# Altium PCB AVR_MAIN.PcbDoc
Units mil, origin at the board's own origin, x right, y up, seen from the top; angles counter-clockwise.
Board outline 1500 x 2200 mil, 2 copper layers (Top Layer, Bottom Layer); 21 components, 23 nets, 91 pads, 1 vias.
Unrouted connection lines stored in the file: 2.
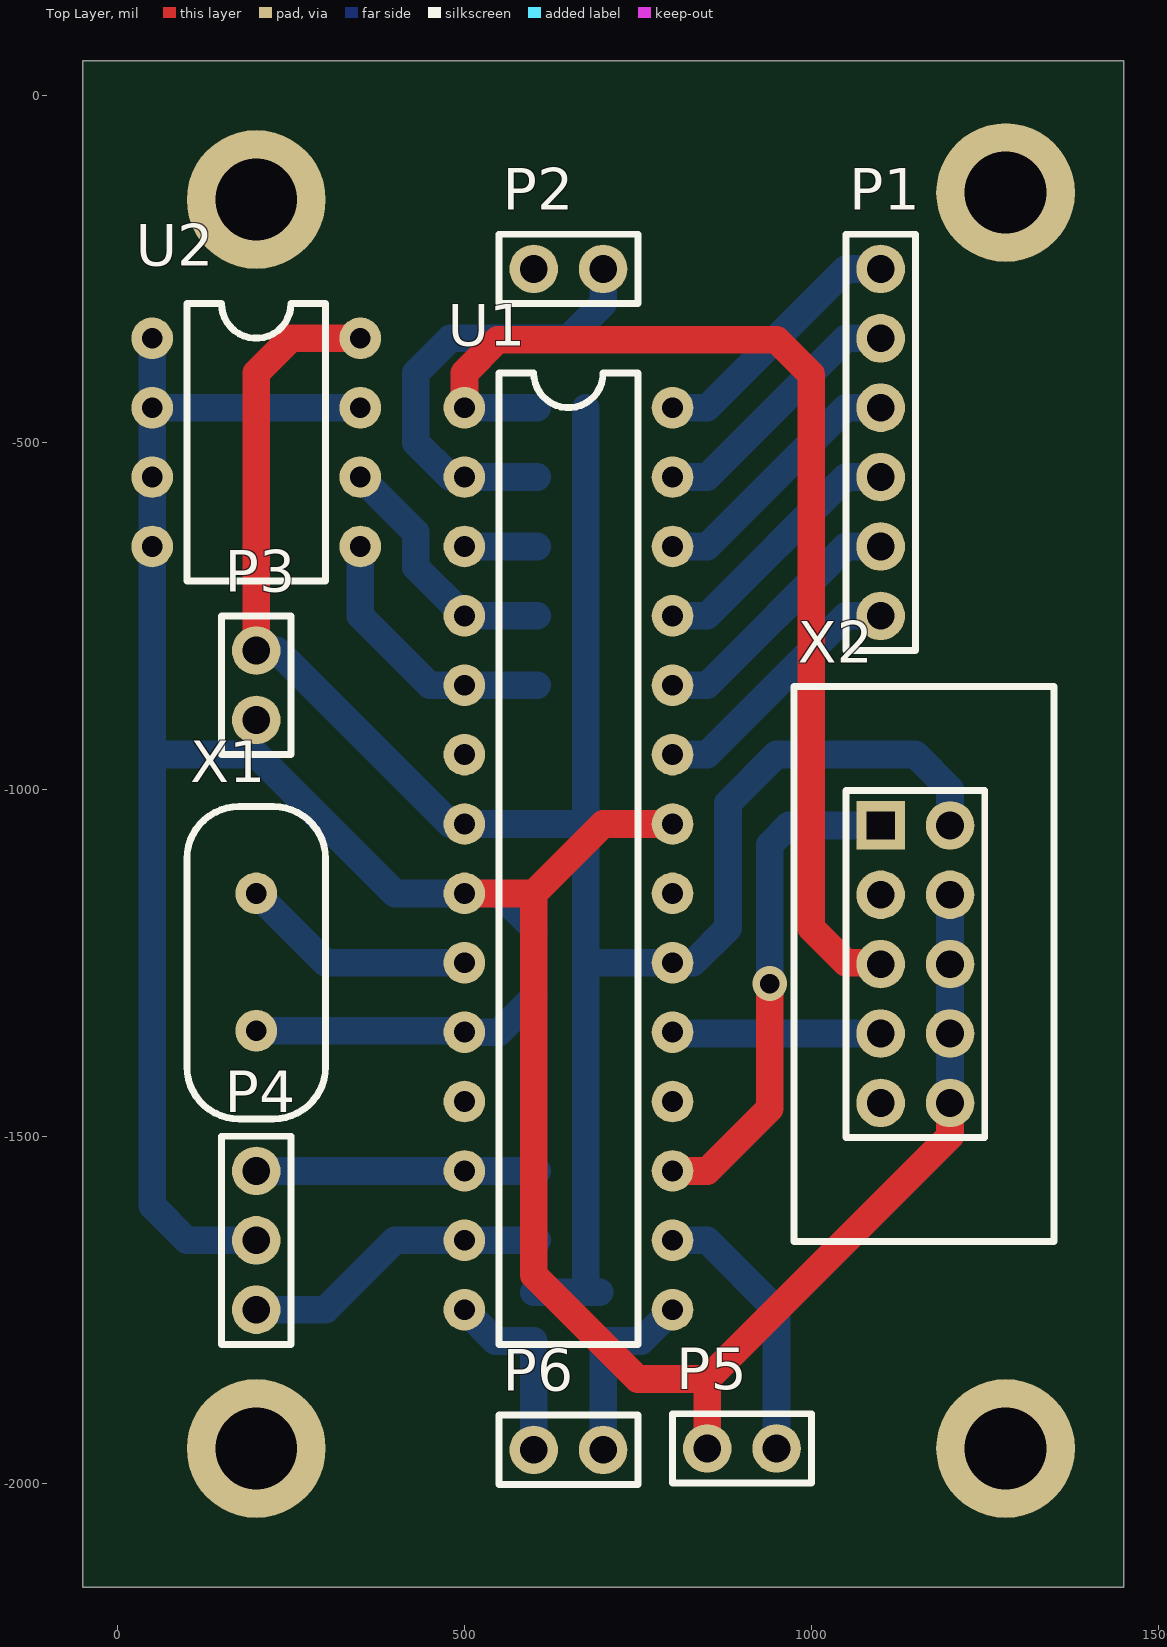
[diagram p0: Top Layer view]
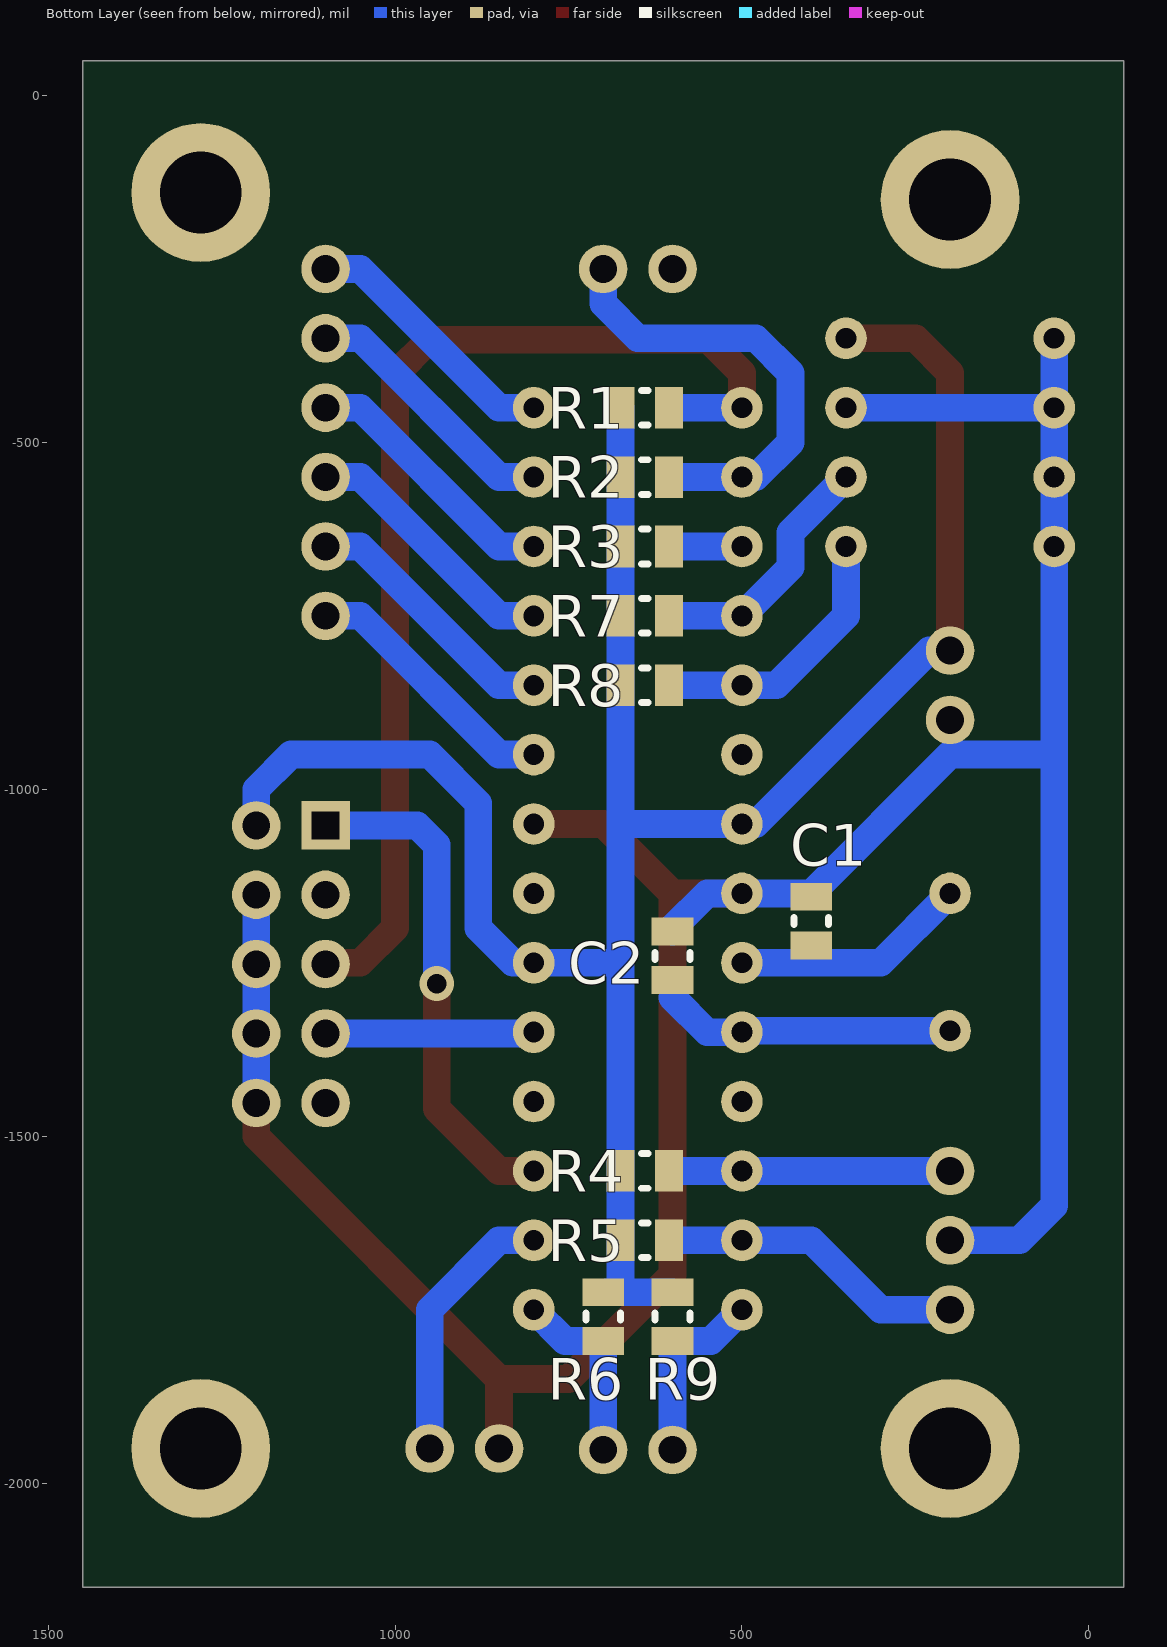
[diagram p1: Bottom Layer view, seen from below]
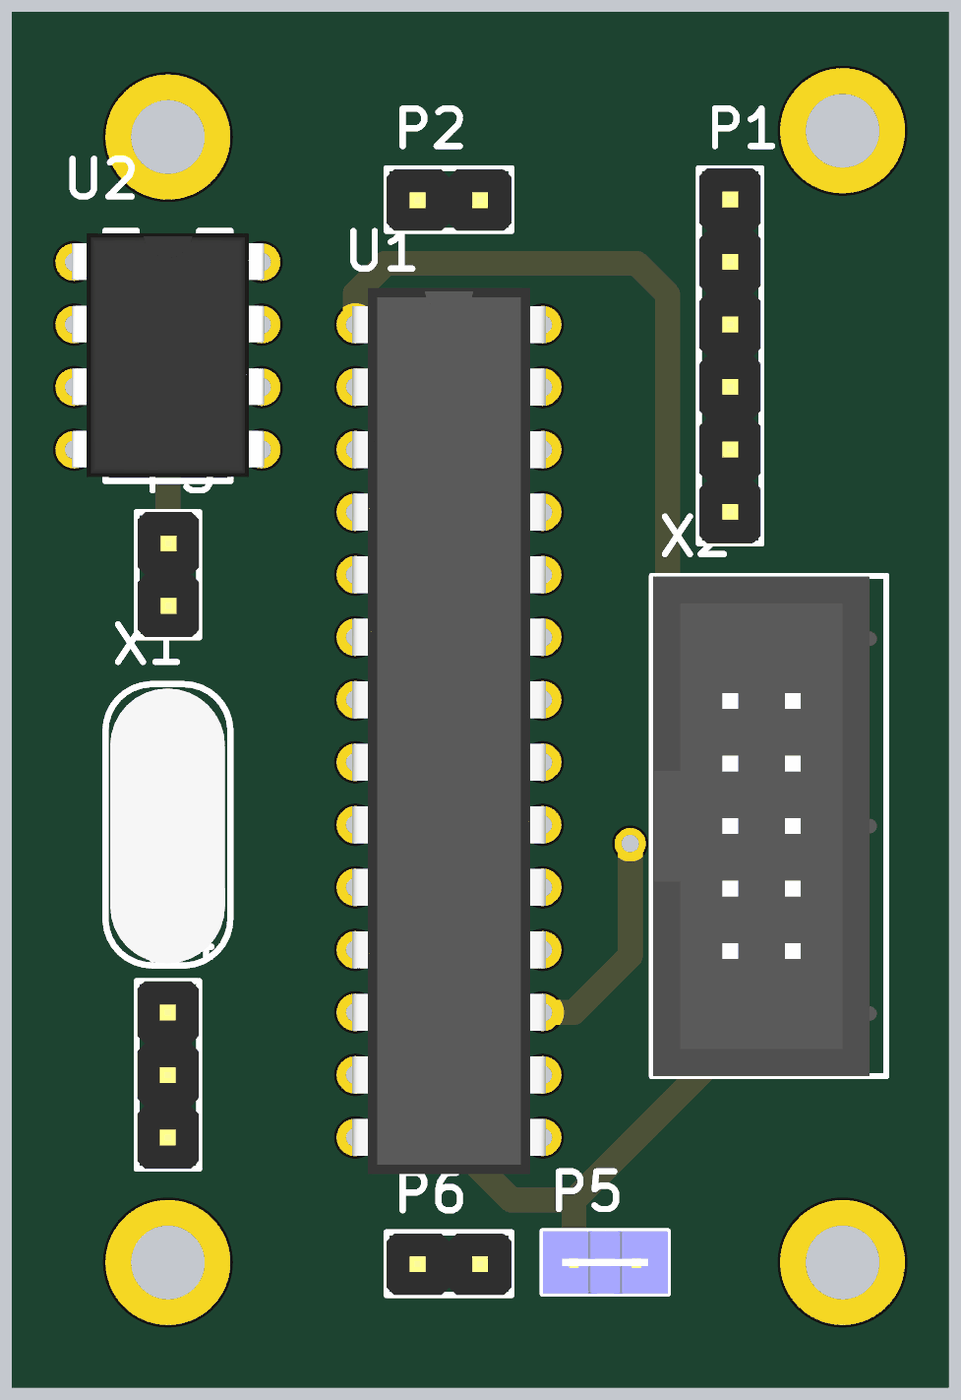
[diagram p2: 3D render of the assembled board from above, using the file's embedded part models]
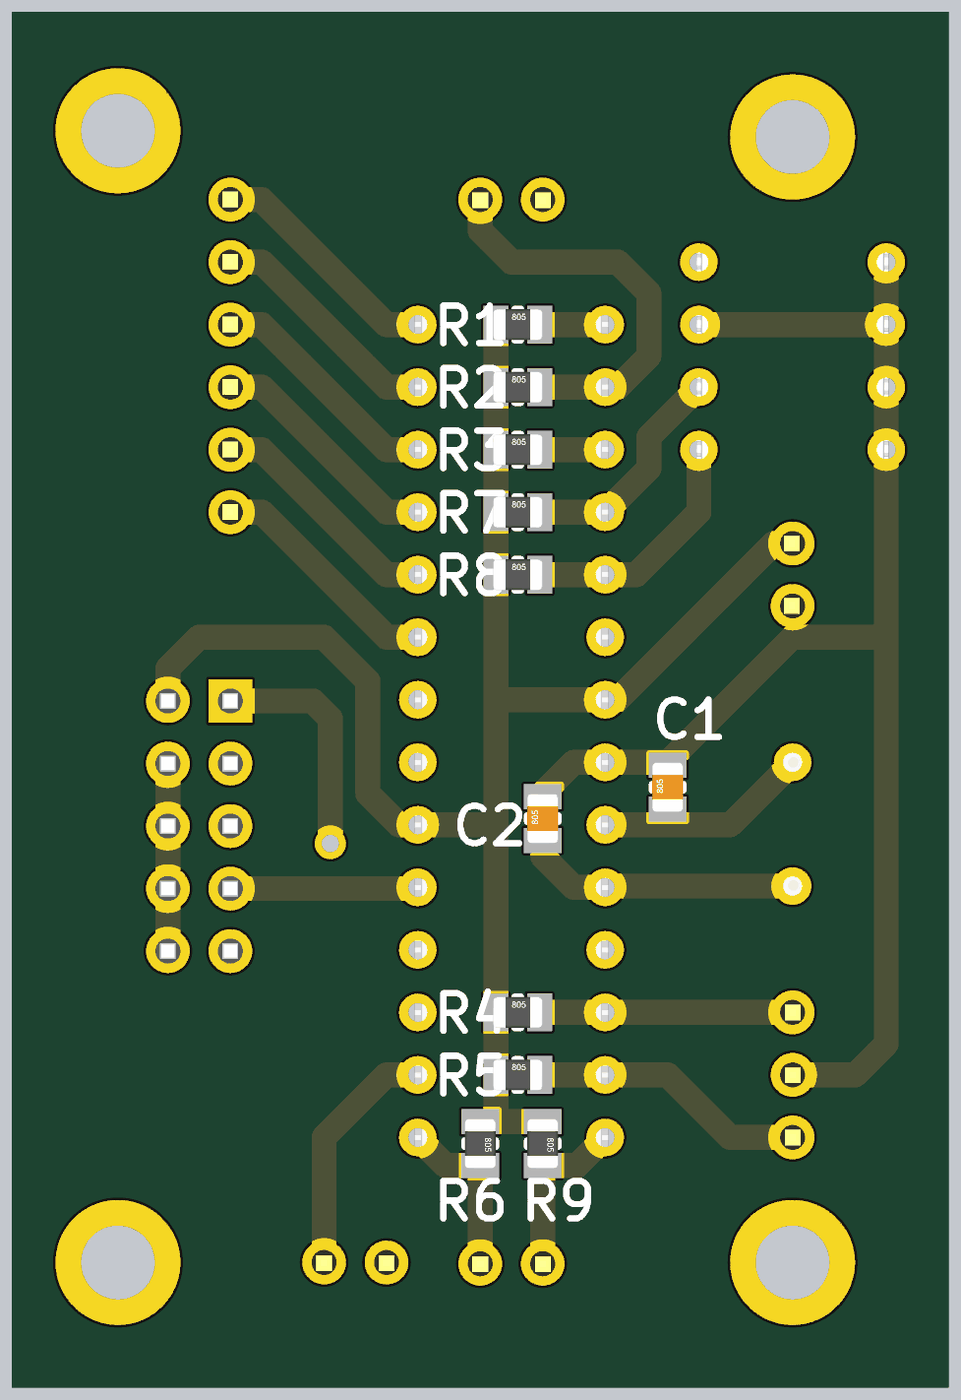
[diagram p3: 3D render of the assembled board from below, using the file's embedded part models]

## Layer stack, top to bottom
Top Solder: solder mask 0.4, Solder Resist, Dk 3.5
Top Layer: signal copper 1.4
Dielectric1: dielectric 12.6, FR-4, Dk 4.8
Bottom Layer: signal copper 1.4
Bottom Solder: solder mask 0.4, Solder Resist, Dk 3.5

## Board outline
-50,-2150 -50,50 1450,50 1450,-2150

## Design rules (kind name [scope] priority, off if disabled: settings)
Clearance [All] p1: gap=10
ComponentClearance [All] p1 off: gap=1 collisioncheckmode=3 verticalgap=100000 showdistances=FALSE
FabricationTestPointUsage TestPointUsage [All] p1: valid=0 allowmultiple=FALSE
FabricationTestpoint Testpoint [All] p1: side=3 testpointundercomponent=TRUE minsize=40 maxsize=100 preferedsize=60 minholesize=0 maxholesize=40 preferedholesize=32 testpointgrid=1 allowsidetop=TRUE allowsidebottom=TRUE usegrid=TRUE gridtolerance=0.01
PasteMaskExpansion [All] p1 off: expansion=0
PolygonConnect [All] p1: connectstyle=Relief reliefconductorwidth=10 reliefentries=4 polygonreliefangle="90 Angle" airgapwidth=10
RoomDefinition AVR_MAIN [InComponentClass('AVR_MAIN')] p1: confinementstyle=ConfineIn formatcopy=TRUE lockcomponents=FALSE outline 0,-2102 1400,-2102 1400,-2 0,-2
RoutingVias [All] p1: holewidth=28 width=50 viastyle="Through Hole" minholewidth=28 minwidth=50 maxholewidth=28 maxwidth=50
SilkToSolderMaskClearance SilkscreenOverComponentPads [IsPad] p1 off: minsilkscreentomaskgap=10 clearancetoexposedcopper=TRUE
SolderMaskExpansion [All] p1 off: expansion=4
Width [All] p1: maxlimit=80 minlimit=10 preferedwidth=40
24 further rules are at their usual default settings.

## Components (designator, comment, footprint, x,y, rotation, side; value= is the part's Value field where it differs from the comment)
C1 "Capacitor" 0805_Capacitor 400,-1150 r180 bottom
C2 "Capacitor" 0805_Capacitor 600,-1200 r180 bottom
P1 "SIL-CONN-6" SIL-CONN-6 1100,-750 r180 top
P2 "SIL-CONN-2" SIL-CONN-2 700,-250 r270 top
P3 "SIL-CONN-2" SIL-CONN-2 200,-800 r0 top
P4 "SIL-CONN-3" SIL-CONN-3 200,-1550 r0 top
P5 "SIL-CONN-2" SIL-CONN-2-jumper 950,-1950 r270 top
P6 "SIL-CONN-2" SIL-CONN-2 700,-1952 r270 top
R1 "Resistor" 0805_Resistor 600,-450 r270 bottom
R2 "Resistor" 0805_Resistor 600,-550 r270 bottom
R3 "Resistor" 0805_Resistor 600,-650 r270 bottom
R4 "Resistor" 0805_Resistor 600,-1550 r270 bottom
R5 "Resistor" 0805_Resistor 600,-1650 r270 bottom
R6 "Resistor" 0805_Resistor 700,-1800 r0 bottom
R7 "Resistor" 0805_Resistor 600,-750 r270 bottom
R8 "Resistor" 0805_Resistor 600,-850 r270 bottom
R9 "Resistor" 0805_Resistor 600,-1800 r0 bottom
U1 "ATMEGA8-PU" DIP28_Narrow 500,-450 r0 top
U2 "24LC16B" DIP8 50,-350 r0 top
X1 "Crystal" HC49 200,-1350 r180 top
X2 "DIL-CONN-10" DIL-CONN-IDC-10 1100,-1052 r0 top

## Footprints (in the part's own frame and the unit in brackets; to place one, negate y for a bottom-side part, rotate by r counter-clockwise, add the part's x,y. Pads: shape width x height; smd on the part's side, far side on the other; paste and mask are expansions set on the pad)
0805_Capacitor [mil]
  rect 60x40 smd: 1(0,-5) 2(0,-75)
  silkscreen extent -25,-45 25,-35, body extent -25,-79 25,-1, height 31
0805_Resistor [mil]
  rect 60x40 smd: 1(0,-5) 2(0,-75)
  silkscreen extent -25,-45 25,-35, body extent -25,-79 25,-1, height 31
DIL-CONN-IDC-10 [mil]
  rect 70x70 hole 40 square: 1(0,0)
  round 70 hole 40: 2(100,0) 3(0,-100) 4(100,-100) 5(0,-200) 6(100,-200) 7(0,-300) 8(100,-300) 9(0,-400) 10(100,-400)
  silkscreen extent -125,-600 250,200, body extent -123,-600 235,200, height 366
DIP8 [mil]
  round 60 hole 30: 1(0,0) 2(0,-100) 3(0,-200) 4(0,-300) 5(300,-300) 6(300,-200) 7(300,-100) 8(300,0)
  silkscreen extent 50,-350 250,50, body extent -4,-344 304,46, height 180
DIP28_Narrow [mil]
  round 60 hole 30: 1(0,0) 2(0,-100) 3(0,-200) 4(0,-300) 5(0,-400) 6(0,-500) 7(0,-600) 8(0,-700) 9(0,-800) 10(0,-900) 11(0,-1000) 12(0,-1100) 13(0,-1200) 14(0,-1300) 15(300,-1300) 16(300,-1200) 17(300,-1100) 18(300,-1000) 19(300,-900) 20(300,-800) 21(300,-700) 22(300,-600) 23(300,-500) 24(300,-400) 25(300,-300) 26(300,-200) 27(300,-100) 28(300,0)
  silkscreen extent 50,-1350 250,50, body extent -5,-1359 305,59, height 200
HC49 [mil]
  round 60 hole 30: 1(0,-2) 2(0,-200)
  silkscreen extent -100,-325 100,125, body extent -91,-318 93,122, height 531
SIL-CONN-2 [mil]
  round 70 hole 40: 1(0,0) 2(0,-100)
  silkscreen extent -50,-150 50,50, body extent -48,-150 50,50, height 336
SIL-CONN-2-jumper [mil]
  round 70 hole 40: 1(0,0) 2(0,-100)
  silkscreen extent -50,-150 50,50, body extent -50,-150 50,50, height 356
SIL-CONN-3 [mil]
  round 70 hole 40: 1(0,0) 2(0,-100) 3(0,-200)
  silkscreen extent -50,-250 50,50, body extent -49,-250 49,50, height 336
SIL-CONN-6 [mil]
  round 70 hole 40: 1(0,0) 2(0,-100) 3(0,-200) 4(0,-300) 5(0,-400) 6(0,-500)
  silkscreen extent -50,-550 50,50, body extent -49,-550 49,50, height 336

## Free pads (board coordinates)
  round 200 hole 118.11: ""(200,-1950) ""(200,-150) ""(1280,-1950) ""(1280,-140)

## Via types
v1: diameter 50, hole 28, Top Layer to Bottom Layer, 1 vias

## Nets (pads, with @x,y where several pads share a name; then routed paths per layer and width w, separated by ;. In a path a pad name is that pad's centre, name@x,y a point inside that pad or via, vN(x,y) a via of type N, cw(c..) or ccw(c..) an arc to the next point about the centre after c; other vN are vias at no path point)
ENC1: P4.1 R4.1 U1.12 | length 405
  Bottom Layer w40: P4.1 U1.12 R4.1
ENC2: P4.3 R5.1 U1.13 | length 446.4
  Bottom Layer w40: P4.3 300,-1750 400,-1650 U1.13 R5.1
GND: C1.1 C2.1 P3.2 P4.2 P5.2 U1.8 U1.22 U2.1 U2.2 U2.3 U2.4 U2.7 X2.4 X2.6 X2.8 X2.10 | length 4525.8
  Top Layer w40: U1.8 600,-1150 ; U1.22 700,-1050 600,-1150 ; P5.2 850,-1850 ; X2.10@1200,-1450 X2.10 1200,-1500 850,-1850 ; 600,-1150 600,-1700 750,-1850 850,-1850
  Bottom Layer w40: U2.1 U2.2 ; P4.2 100,-1650 50,-1600 50,-950 ; U2.7 U2.2 ; C2.1 600,-1200 550,-1150 U1.8 400,-1150 200,-950 50,-950 ; X2.10@1200,-1450 X2.8 X2.6 X2.4 ; 50,-950 U2.4 U2.3 U2.2
I2C_SCK: R7.1 U1.4 U2.6 | length 367.1
  Bottom Layer w40: U2.6 430,-630 430,-680 U1.4 R7.1
I2C_SDA: R8.1 U1.5 U2.5 | length 396.4
  Bottom Layer w40: U2.5 350,-750 450,-850 U1.5 R8.1
KBD: P6.1 R6.1 U1.15 | length 270.6
  Bottom Layer w40: P6.1 R6.1@700,-1800 ; R6.1 755,-1795 U1.15
MISO: U1.18 X2.9
MODE: P6.2 R9.1 U1.14 | length 270.6
  Bottom Layer w40: U1.14 545,-1795 R9.1 ; P6.2 R9.1@600,-1800
MOSI: U1.17 X2.1 | length 728.9
  Top Layer w40: U1.17 850,-1550 940,-1460 v1(940,-1280)
  Bottom Layer w40: v1(940,-1280) 940,-1080 968,-1052 X2.1
NetP1_1: P1.1 U1.23 | length 382.8
  Bottom Layer w40: U1.23 850,-950 1050,-750 P1.1
NetP1_2: P1.2 U1.24 | length 382.8
  Bottom Layer w40: U1.24 850,-850 1050,-650 P1.2
NetP1_3: P1.3 U1.25 | length 382.8
  Bottom Layer w40: U1.25 850,-750 1050,-550 P1.3
NetP1_4: P1.4 U1.26 | length 382.8
  Bottom Layer w40: U1.26 850,-650 1050,-450 P1.4
NetP1_5: P1.5 U1.27 | length 382.8
  Bottom Layer w40: U1.27 850,-550 1050,-350 P1.5
NetP1_6: P1.6 U1.28 | length 382.8
  Bottom Layer w40: U1.28 850,-450 1050,-250 P1.6
RESET: R1.1 U1.1 X2.5 | length 1614.3
  Top Layer w40: U1.1 500,-400 548,-352 950,-352 1000,-402 1000,-1200 1050,-1250 X2.5@1100,-1250
  Bottom Layer w40: U1.1 R1.1
RST: P5.1 U1.16 | length 391.4
  Bottom Layer w40: U1.16 850,-1650 950,-1750 P5.1
SCK: U1.19 X2.7 | length 298
  Bottom Layer w40: U1.19@802,-1352 X2.7
UART_RX: P2.1 R2.1 U1.2 | length 657.1
  Bottom Layer w40: R2.1 U1.2 480,-550 430,-500 430,-400 480,-350 650,-350 700,-300 P2.1
UART_TX: P2.2 R3.1 U1.3 | length 105
  Bottom Layer w40: U1.3 R3.1
VCC: P3.1 R1.2 R2.2 R3.2 R4.2 R5.2 R6.2 R7.2 R8.2 R9.2 U1.7 U1.20 U2.8 X2.2 | length 3309.7
  Top Layer w40: P3.1 200,-400 250,-350 U2.8
  Bottom Layer w40: P3.1 230,-800 480,-1050 U1.7 670,-1050 ; R9.2 R6.2@695,-1725 ; R6.2@675,-1715 R5.2 R4.2 R8.2 ; R8.2@675,-845 R7.2 R3.2 R2.2 R1.2 ; 690,-1250 U1.20 830,-1250 880,-1200 880,-1020 950,-950 1150,-950 1200,-1000 X2.2@1200,-1050
X1: C1.2 U1.9 X1.2 | length 341.4
  Bottom Layer w40: X1.2 300,-1250 U1.9
X2: C2.2 U1.10 X1.1 | length 424.3
  Bottom Layer w40: X1.1 U1.10@498,-1348 ; U1.10@496.06,-1348.06 U1.10@500,-1352 ; U1.10 550,-1350 600,-1300
pads on no net: U1.6 U1.11 U1.21 X2.3

## Silkscreen, mask and mechanical layers (free items; w line width, h text height)
Mechanical 1:
  the board outline again, w10